# EAGLE board LED-Test-Board v16 (EAGLE 9.7.0)
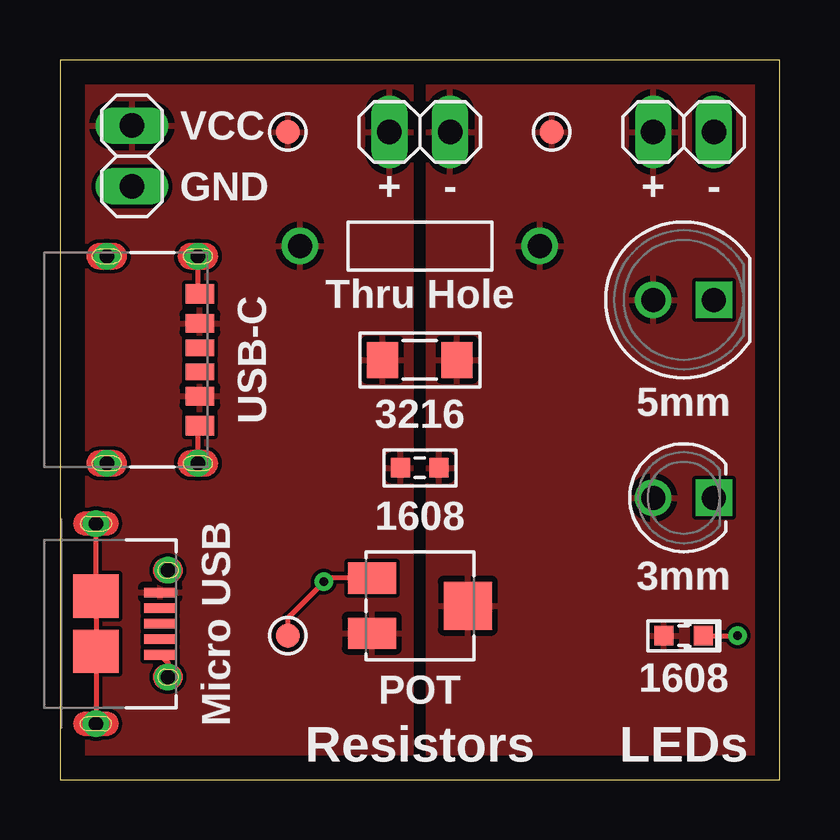
[diagram p0: board, top side]
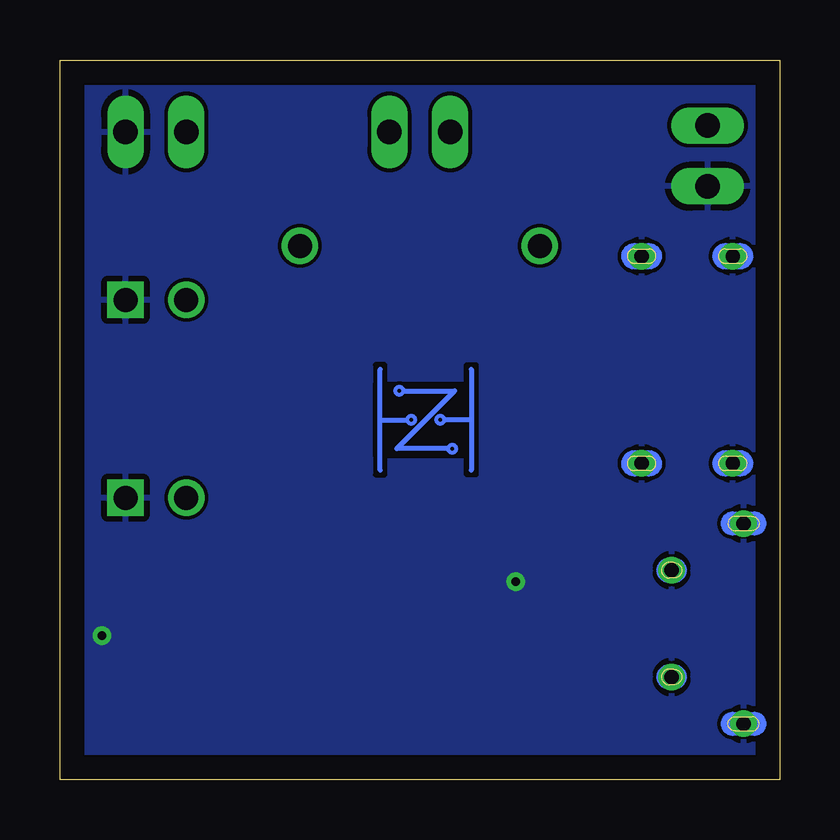
[diagram p1: board, bottom side, seen from below]

Size 30 x 30 mm. Coordinates in mm from the lower left corner, seen from the top.
Outline: 0,0 30,0 30,30 0,30 0,0
Copper layers (1*16): Top 0.035mm / dielectric 1.5mm / Bottom 0.035mm
Design rules "default": minimum track width 6mil, minimum drill 0.35mm, track to track 6mil, track to pad 6mil, pad to pad 6mil, via to via 6mil, smd to smd 6mil, copper to edge 40mil, drill to drill 6mil, minimum pad ring 10mil, minimum via ring 8mil, stop-mask expansion 4mil, vias tented up to drill 0mil, thermal gap 10mil

## Footprints (pad centres in the part's own frame; a part is rotated, then mirrored left to right if it is on the bottom)
5MM-TH = drill 1 square: 1 -1.27,0 | drill 1: 2 1.27,0
3MM-TH = drill 1 square: 1 -1.27,0 | drill 1: 2 1.27,0
1608 = smd 0.8 x 0.8: 1 -0.825,0; 2 0.825,0
TEST-POINT = smd 1 x 1: TP 0,0
47589-0001 = smd 0.4 x 1.35: 1 -1.3,2.675; 2 -0.65,2.675; 3 0,2.675; 4 0.65,2.675; 5 1.3,2.675 | drill 0.6 pad 0.9: SHIELD@1 -2.225,3; SHIELD@2 2.225,3; SHIELD@3 -4.175,0; SHIELD@6 4.175,0 | smd 1.8 x 1.9: SHIELD@4 -1.15,0; SHIELD@5 1.15,0
USB-4125 = smd 0.7 x 1.2: A5 -0.5,0.08; B5 0.5,0.08 | smd 0.76 x 1.2: A9 1.52,0.08; B9 -1.52,0.08 | smd 0.8 x 1.2: A12 2.75,0.08; B12 -2.75,0.08 | drill 0.6 pad 0.9: SHELL@1 -4.32,0; SHELL@2 4.32,0; SHELL@3 -4.32,-3.8; SHELL@4 4.32,-3.8
1X02 = drill 1.016 long: 1 -1.27,0; 2 1.27,0
1/4W-TH = drill 1: 1 -5,0; 2 5,0
3216-SEM = smd 1.3 x 1.5: 1 -1.55,0; 2 1.55,0
1608-SEM = smd 0.8 x 0.8: 1 -0.8,0; 2 0.8,0
3314J = smd 1.3 x 2: 1 -1.15,2; 3 1.15,2 | smd 2 x 2: 2 0,-2

## Placement (x,y rotation side)
DS1  Blue  [5MM-TH]  26,20 180 top
DS2  Blue  [3MM-TH]  26,11.75 180 top
DS3  Blue  [1608]  26,6 180 top
GND  TEST-POINT  [TEST-POINT]  9.5,6 0 top
J1  MICRO-USB-AB  [47589-0001]  1.5,6.5 270 top
J2  USB-C-CHARGING  [USB-4125]  5.75,17.5 270 top
JP1  [1X02]  3,26 270 top
JP2  [1X02]  15,27 180 top
JP3  [1X02]  26,27 180 top
LED+  TEST-POINT  [TEST-POINT]  20.5,27 0 top
R1  4.7kΩ  [1/4W-TH]  15,22.25 0 top
R2  10Ω ± 1%  [3216-SEM]  15,17.5 0 top
R3  0Ω + 50mΩ Max  [1608-SEM]  15,13 0 top
R4  100kΩ  [3314J]  15,7.25 90 top
U$5  SIGNATURE  [SIGNATURE]  14.75,15 0 bottom
VCC  TEST-POINT  [TEST-POINT]  9.5,27 0 top

## Library data of the parts
DS1 = Harrington-Diodes; SIZE: 5mm; TEMPERATURE: -40~85°C; VOLTAGE: 3.0~3.4V
DS2 = Harrington-Diodes; SIZE: 3mm; TEMPERATURE: -40~85°C; VOLTAGE: 3.0~3.4V
DS3 = Harrington-Diodes; SIZE: 1608; TEMPERATURE: -40~85°C; VOLTAGE: 3.3~4.0V
GND LED+ VCC = Harrington-Symbols
J1 J2 = Harrington-Connectors
JP1-JP3 = pinhead
R1 = Harrington-Resistors; POWER: 1/4W
R2 = Harrington-Resistors; POWER: 1/4W; TEMPERATURE: -55~155°C; VOLTAGE: 1.58V
R3 = Harrington-Resistors; POWER: 1/10W; TEMPERATURE: -55~155°C; VOLTAGE: 50mV
R4 = Harrington-Resistors
U$5 = Harrington-Aesthetics

## Nets
GND: DS1.1 DS2.1 DS3.1 GND.TP J1.5 J1.SHIELD@1 J1.SHIELD@2 J1.SHIELD@3 J1.SHIELD@4 J1.SHIELD@5 J1.SHIELD@6 J2.A12 J2.B12 J2.SHELL@1 J2.SHELL@2 J2.SHELL@3 J2.SHELL@4 JP1.2 JP3.1 R4.3
RES_OUT: DS1.2 DS2.2 DS3.2 JP2.1 JP3.2 LED+.TP R1.2 R2.2 R3.2 R4.2
VCC: J1.1 J2.A9 J2.B9 JP1.1 JP2.2 R1.1 R2.1 R3.1 R4.1 VCC.TP

## Tracks (layer width: path | path; a pad name or v marks a point on that pad's centre or on a via)
GND  (via drill 0.35)
  Top 0.2: DS3.1 v28.25,6 | R4.3 11.15,8.4 v11,8.25 9.5,6.75 GND.TP | J2.B12 5.75,20.33 J2.SHELL@1 | J2.SHELL@2 5.75,14.67 J2.A12 | J1.SHIELD@3 J1.SHIELD@4 J1.SHIELD@5 J1.SHIELD@6 | J1.5 4.5,4.88 J1.SHIELD@2
  pour Bottom: -0.9,-0.9 30.9,-0.9 30.9,30.9 -0.9,30.9
RES_OUT
  pour Top: 15.35,-0.65 30.65,-0.65 30.65,30.65 15.35,30.65
VCC
  pour Top: -0.65,-0.65 14.65,-0.65 14.65,30.65 -0.65,30.65

## Text on the board
tNames: VCC | GND | + | - | + | - | Thru Hole | USB-C | 5mm | 3216 | 1608 | 3mm | Micro USB | POT | 1608 | Resistors | LEDs